# EAGLE board Putri Shaqila_relay (EAGLE 9.6.2)
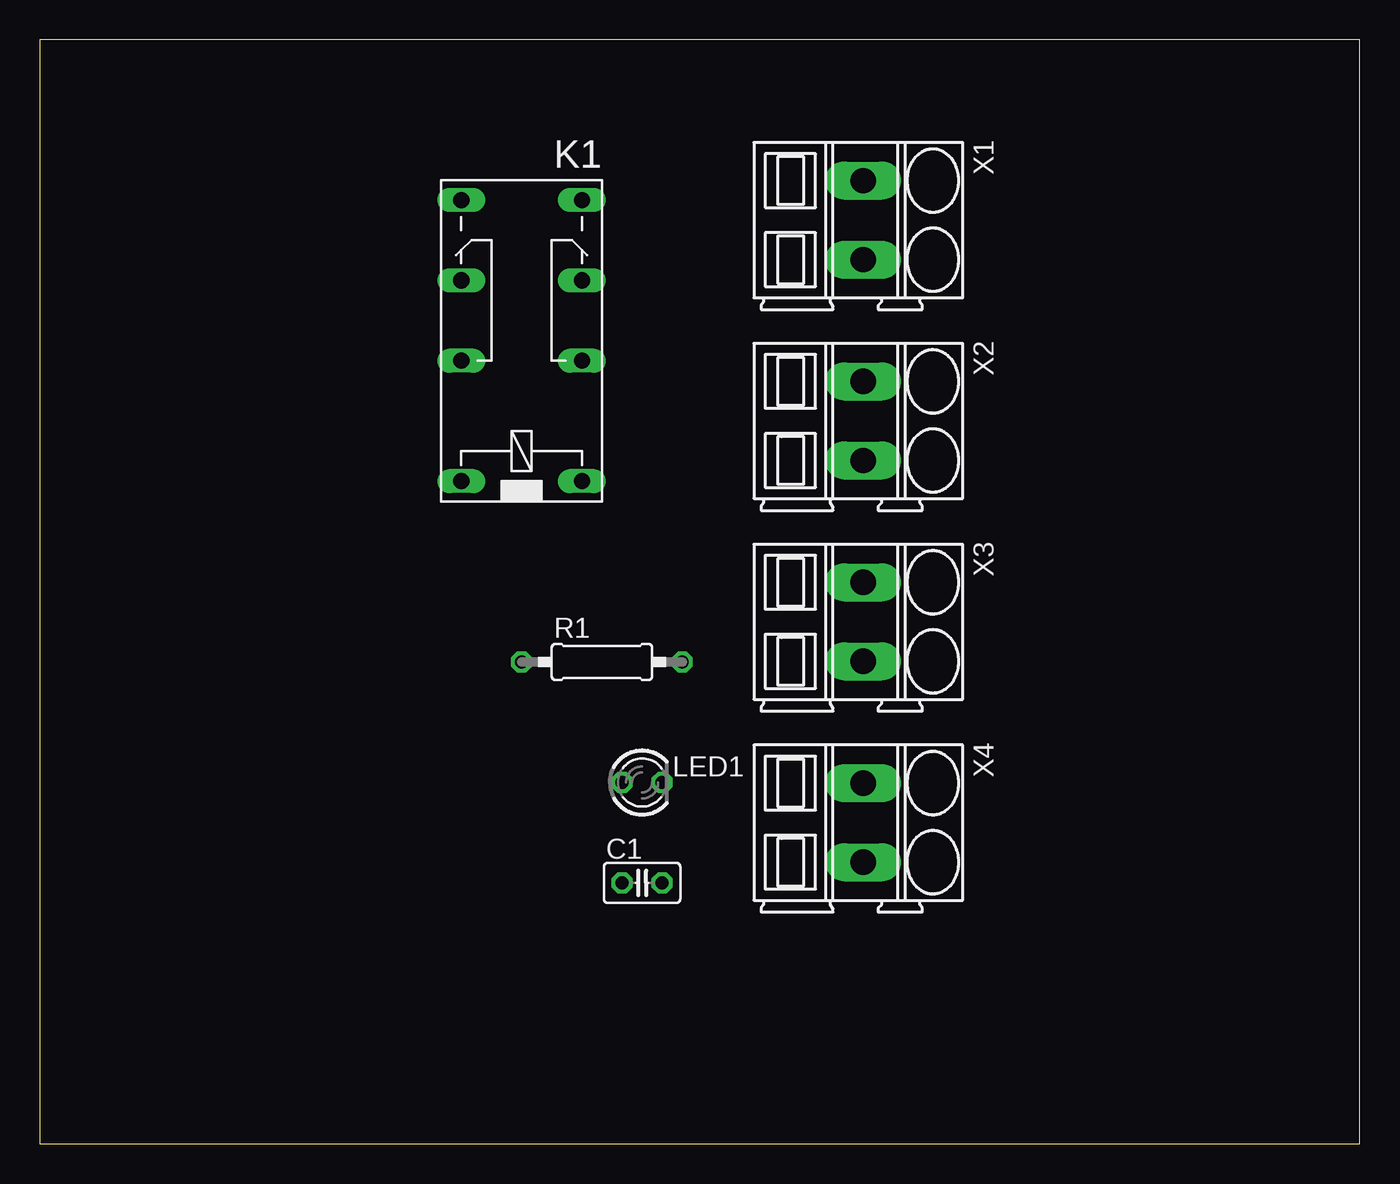
[diagram p0: board, top side]
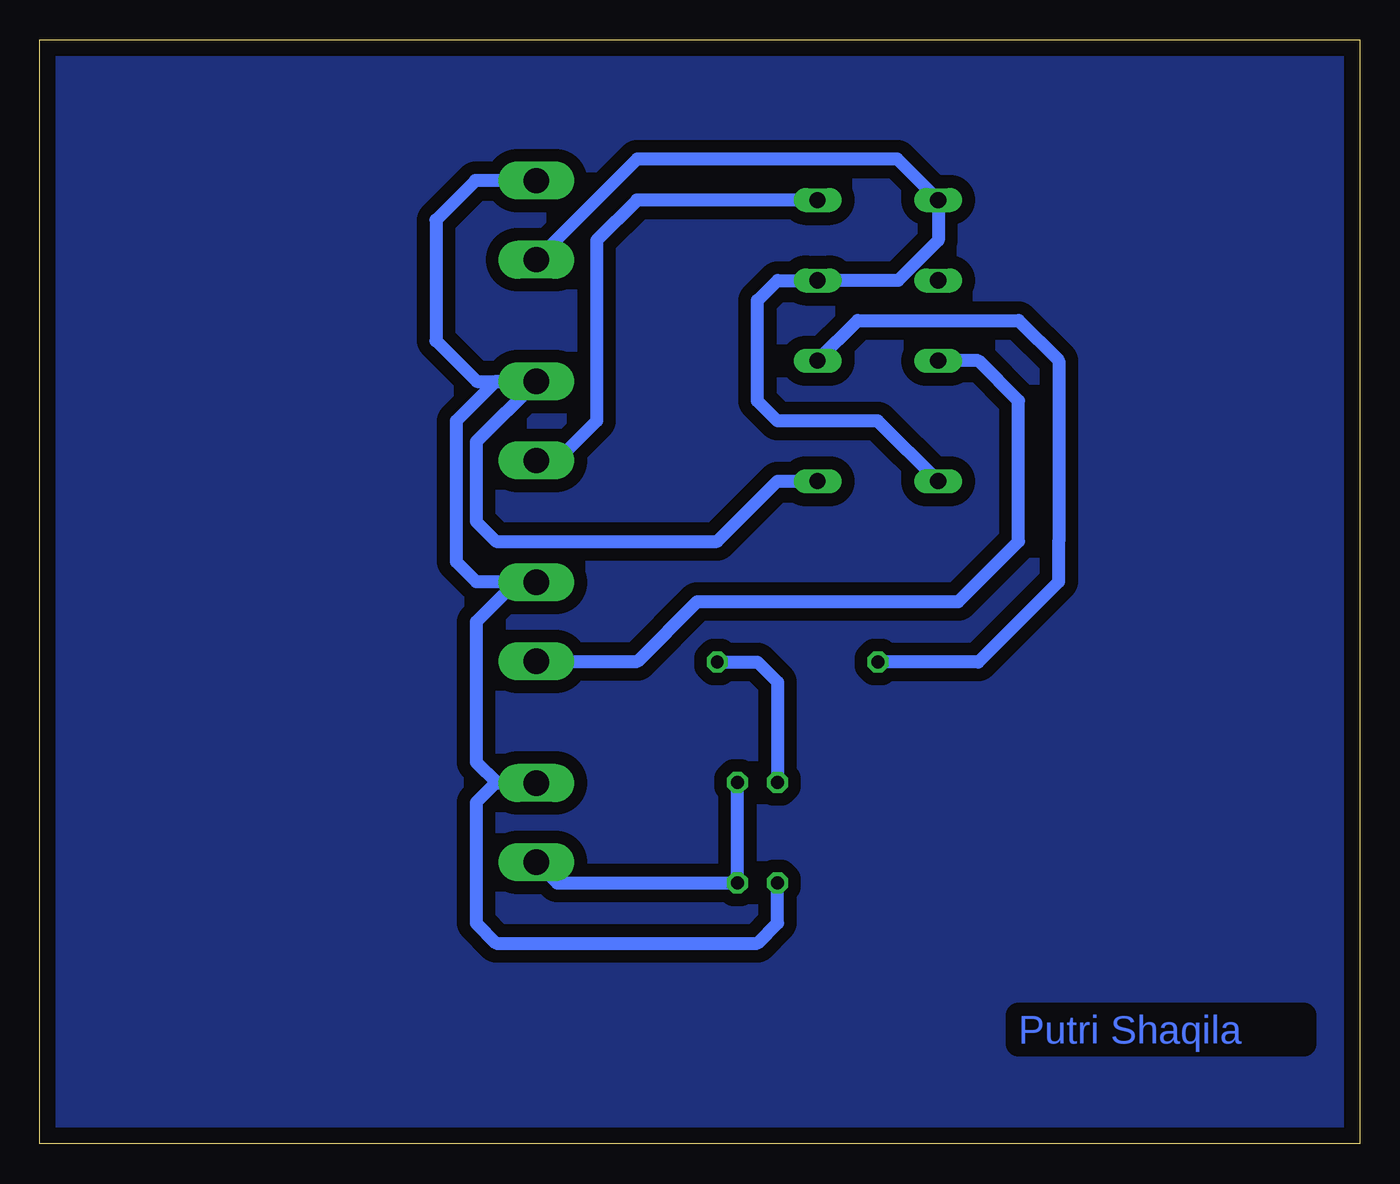
[diagram p1: board, bottom side, seen from below]

Size 83.49 x 69.84 mm. Coordinates in mm from the lower left corner, seen from the top.
Outline: 0,0 83.49,0 83.49,69.84 0,69.84 0,0
Copper layers (1*16): Top 0.035mm / dielectric 1.5mm / Bottom 0.035mm
Design rules "default": minimum track width 6mil, minimum drill 0.35mm, track to track 6mil, track to pad 6mil, pad to pad 6mil, via to via 6mil, smd to smd 6mil, copper to edge 40mil, drill to drill 6mil, minimum pad ring 10mil, minimum via ring 8mil, stop-mask expansion 4mil, vias tented up to drill 0mil, thermal gap 10mil

## Footprints (pad centres in the part's own frame; a part is rotated, then mirrored left to right if it is on the bottom)
C025-025X050 = drill 0.813 octagon: 1 -1.27,0; 2 1.27,0
351 = drill 1.016 long: 1 -3.81,-3.81; 16 -3.81,3.81; O1 8.89,-3.81; O2 8.89,3.81; P1 3.81,-3.81; P2 3.81,3.81; S1 13.97,-3.81; S2 13.97,3.81
LED3MM = drill 0.813 octagon: A -1.27,0; K 1.27,0
0207/10 = drill 0.813 octagon: 1 -5.08,0; 2 5.08,0
SMKDSP_1,5/2 = drill 1.6 pad 1.8 long: 1 -2.5,0; 2 2.5,0

## Placement (x,y rotation side)
C1  [C025-025X050]  38.1,16.51 0 top
K1  351  [351]  30.48,45.72 90 top
LED1  [LED3MM]  38.1,22.86 0 top
R1  [0207/10]  35.56,30.48 0 top
X1  SMKDSP_1,5/2  [SMKDSP_1,5/2]  52.07,58.42 270 top
X2  SMKDSP_1,5/2  [SMKDSP_1,5/2]  52.07,45.72 270 top
X3  SMKDSP_1,5/2  [SMKDSP_1,5/2]  52.07,33.02 270 top
X4  SMKDSP_1,5/2  [SMKDSP_1,5/2]  52.07,20.32 270 top

## Library data of the parts
C1 = rcl; SPICEPREFIX: C
K1 = relay; OC_FARNELL: unknown; OC_NEWARK: unknown
LED1 = led
R1 = rcl; SPICEPREFIX: R
X1-X4 = con-phoenix-smkdsp; MF: FARNELL; MPN: 1733570; OC_FARNELL: 3041244; OC_NEWARK: 69C8588

## Nets
GND: C1.1 K1.1 X1.1 X2.1 X3.1 X4.1
N$1: K1.P1 R1.1
N$2: LED1.A R1.2
O1: K1.S1 X2.2
P2: K1.P2 X3.2
S12: K1.16 K1.O1 K1.S2 X1.2
VOUT: C1.2 LED1.K X4.2

## Tracks (layer width: path | path; a pad name or v marks a point on that pad's centre or on a via)
GND
  Bottom 0.813: X1.1 55.92,60.92 58.42,58.42 58.42,50.8 55.84,48.22 X2.1 | X2.1 54.65,48.22 57.15,45.72 57.15,36.83 55.88,35.56 52.11,35.56 X3.1 53.38,35.52 55.88,33.02 55.88,24.13 54.57,22.82 X4.1 54.65,22.82 55.88,21.59 55.88,13.97 54.61,12.7 38.1,12.7 36.83,13.97 C1.1 | X2.1 55.88,44.41 55.88,39.37 54.61,38.1 40.64,38.1 36.83,41.91 K1.1
N$1
  Bottom 0.813: K1.P1 31.75,52.07 21.59,52.07 19.05,49.53 19.05,38.1 19.05,35.56 24.13,30.48 R1.1
N$2
  Bottom 0.813: R1.2 38.1,30.48 36.83,29.21 LED1.A
O1
  Bottom 0.813: K1.S1 45.72,59.69 48.26,57.15 48.26,45.72 50.8,43.18 52.07,43.18 X2.2
P2
  Bottom 0.813: X3.2 45.68,30.52 41.91,34.29 25.4,34.29 21.59,38.1 21.59,46.99 24.13,49.53 K1.P2
S12
  Bottom 0.813: X1.2 45.71,62.28 29.26,62.28 K1.S2 26.67,57.15 29.21,54.61 K1.O1 36.83,54.61 38.1,53.34 38.1,46.99 36.83,45.72 30.48,45.72 K1.16
S$1
  pour Bottom (isolate 0.813): 0,69.85 0,0 83.82,0 83.82,69.85
VOUT
  Bottom 0.813: X4.2 50.76,16.51 C1.2 LED1.K

## Text on the board
Bottom: Putri Shaqila